# Altium PCB 3KW-139_V1.0_铝基板_IGBT.PcbDoc
Units mm, origin at the board's own origin, x right, y up, seen from the top; angles counter-clockwise.
Board outline 51.43 x 72.33 mm, 2 copper layers (Top Layer, Bottom Layer); 5 components, 26 nets, 4 pads, 0 vias.
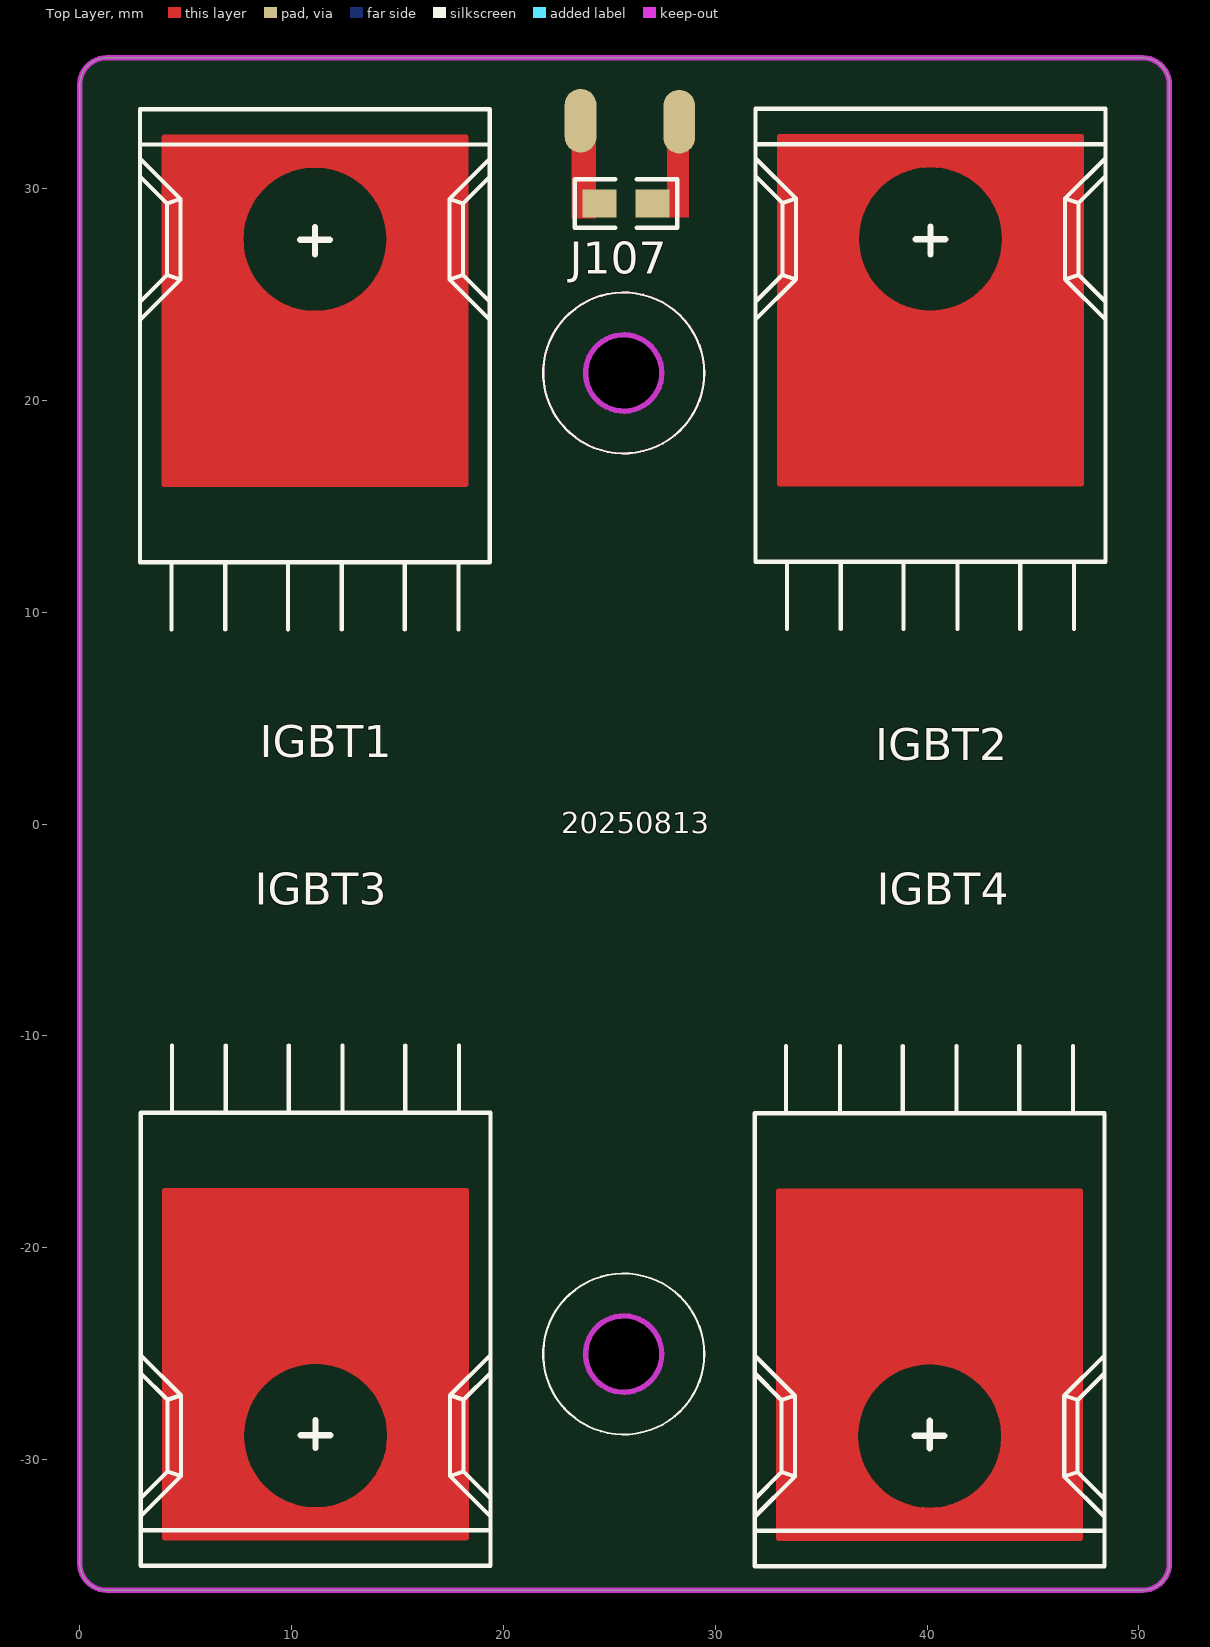
[diagram p0: Top Layer view]
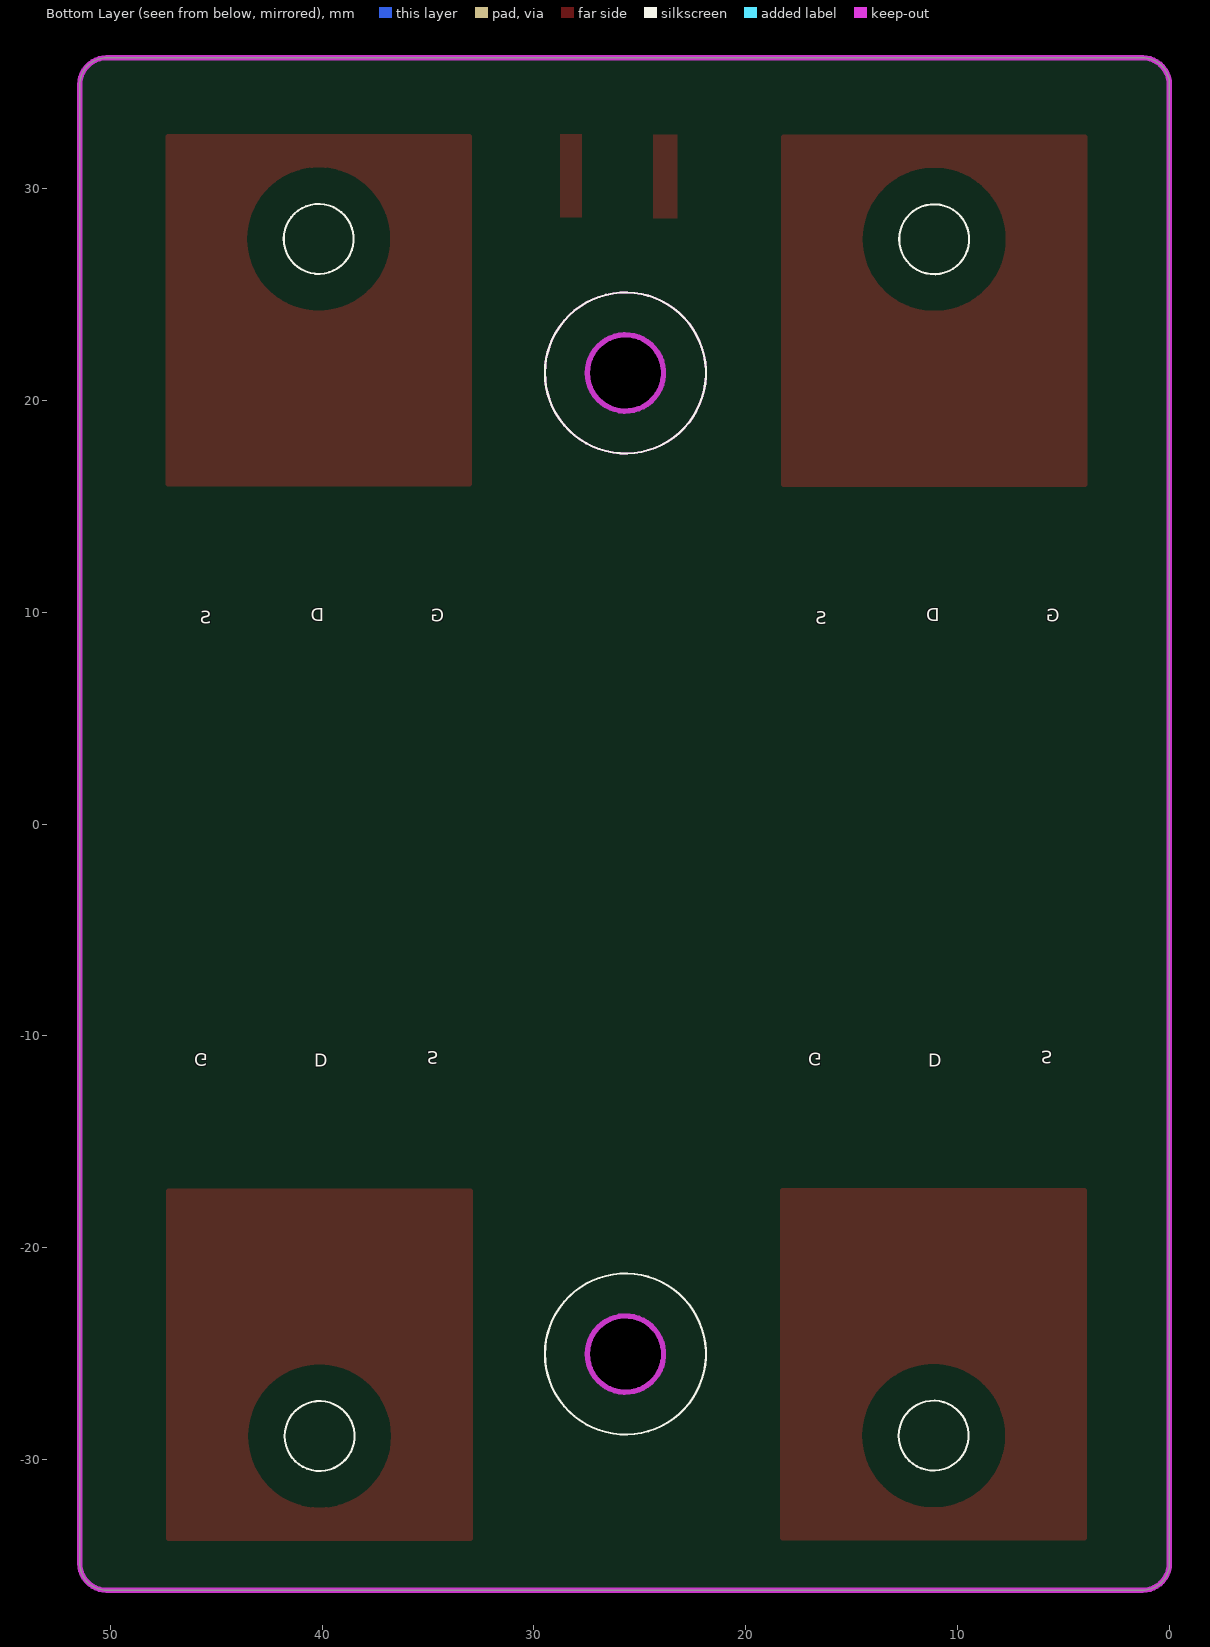
[diagram p1: Bottom Layer view, seen from below]

## Layer stack, top to bottom
Top Solder: solder mask 0.0102, Solder Resist, Dk 3.5
Top Layer: signal copper 0.0356
Dielectric 1: dielectric 0.32, FR-4, Dk 4.8
Bottom Layer: signal copper 0.0356
Bottom Solder: solder mask 0.0102, Solder Resist, Dk 3.5

## Board outline
0.01,-34.89 0.01,34.895 cw(c1.28,34.895) 1.28,36.165 50.165,36.165 cw(c50.165,34.895) 51.435,34.895 51.435,-34.89 cw(c50.165,-34.89) 50.165,-36.16 1.28,-36.16 cw(c1.28,-34.89)
cut-out: 23.882,21.29 ccw(c25.682,21.29) 25.682,19.49 ccw(c25.682,21.29) 27.482,21.29 ccw(c25.682,21.29) 25.682,23.09 ccw(c25.682,21.29)
cut-out: 23.879,-25.014 ccw(c25.679,-25.014) 25.679,-26.814 ccw(c25.679,-25.014) 27.479,-25.014 ccw(c25.679,-25.014) 25.679,-23.214 ccw(c25.679,-25.014)

## Design rules (kind name [scope] priority, off if disabled: settings)
Clearance [All] p1: gap=0.254 ignorepadtopadclearanceinfootprint=FALSE except(0: Arc-Hole Track-Hole SMDPad-Hole THPad-Hole Via-Hole Fill-Hole Poly-Hole Region-Hole Text-Hole)
PolygonConnect [All] p1: connectstyle=Relief reliefconductorwidth=0.254 reliefentries=4 polygonreliefangle="90 Angle" airgapwidth=0.254
RoutingVias [All] p1: holewidth=0.711 width=1.27 viastyle="Through Hole" minholewidth=0.711 minwidth=1.27 maxholewidth=0.711 maxwidth=1.27
SolderMaskExpansion [All] p1: expansion=0.102
Width [All] p1: maxlimit=0.254 minlimit=0.254 preferedwidth=0.254
30 further rules are at their usual default settings.

## Components (designator, comment, footprint, x,y, rotation, side; value= is the part's Value field where it differs from the comment)
IGBT1 "Comment" TO-247TP 11.11,27.599 r0 top locked
IGBT2 "Comment" TO-247TP 40.159,27.615 r0 top locked
IGBT3 "Comment" TO-247TP 11.138,-28.863 r180 top locked
IGBT4 "Comment" TO-247TP 40.117,-28.884 r180 top locked
J107 "Comment" 0805 25.789,29.287 r180 top

## Footprints (in the part's own frame and the unit in brackets; to place one, negate y for a bottom-side part, rotate by r counter-clockwise, add the part's x,y. Pads: shape width x height; smd on the part's side, far side on the other; paste and mask are expansions set on the pad)
0805 [mm]
  rect 1.6x1.3 smd: 1(-1.25,0) 2(1.25,0)
  silkscreen extent -2.41,-1.14 2.41,1.14, body extent -1.01,-0.62 0.99,0.58, height 0.5
TO-247TP [mm]
  Top Layer circle w0.254: c0,0 r3.5
  Top Layer region: 0.127,-3.556 -1.778,-3.429 -0.889,-11.557 0.635,-11.557 0.508,-3.429
  Top Layer region: -7.112,4.826 -7.112,-11.557 0.127,-11.557 0.127,-3.429 -0.889,-3.429 -2.032,-2.921 -3.175,-1.524 -3.429,-0.381 -3.429,0.635 -3.048,1.651 -2.159,2.794 -1.143,3.302 0.127,3.556 1.905,3.048 2.921,2.032 3.429,0.889 3.429,-0.508 3.048,-1.778 2.159,-2.794 1.016,-3.429 -0.762,-3.683 -0.635,-11.557 6.985,-11.557 6.985,4.826
  Top Layer lines w0.254: 4.318,-11.557 7.112,-11.557 7.112,-10.287 7.112,4.826 -7.112,4.826 ; -7.112,4.826 -7.112,3.302 -7.112,-11.557 -5.461,-11.557 6.985,-11.557 6.985,4.826 -7.112,4.826
  silkscreen extent -8.25,-18.41 8.26,6.14

## Free pads (board coordinates)
  oval 1.5x3 smd: 61(23.643,33.193) 61(28.3,33.15)

## Nets (pads, with @x,y where several pads share a name; then routed paths per layer and width w, separated by ;. In a path a pad name is that pad's centre, name@x,y a point inside that pad or via, vN(x,y) a via of type N, cw(c..) or ccw(c..) an arc to the next point about the centre after c; other vN are vias at no path point)
+15V-1: 
+15V-3: 
-9V-1: 
-9V-3: 
GND-1: 
LINE_L1: 
LINE_N: 
LINE_N1: 
NetC61_2: 
NetC65_2: 
NetC75_2: 
NetC76_1: 
NetD22_A: 
NetD23_A: 
NetD23_K: 
NetD24_A: 
NetD24_K: 
NetD25_A: 
NetD25_K: 
NetR75_2: 
NetR87_2: 
PWM2L: 
U_BUS: 
VO2: 
VO3: 
VO4: 
pads on no net: J107.1 J107.2

## Keep-outs
Keep-Out Layer:
  circle w0.254: c25.679,-25.014 r1.8
  circle w0.254: c25.682,21.29 r1.8
  circle w0.1: c25.682,21.29 r3.8
  lines w0.254: 1.27,36.165 50.165,36.165 cw(c50.165,34.895) 51.435,34.895 51.435,-34.89 cw(c50.165,-34.89) 50.165,-36.16 1.28,-36.16 cw(c1.28,-34.89) 0.01,-34.89 0.01,34.895 cw(c1.28,34.895) 1.28,36.165

## Other copper
Top Layer:
  region: 28.773,28.621 28.773,32.558 27.721,32.558 27.721,28.621
  region: 24.373,28.578 24.373,32.538 23.214,32.538 23.214,28.578

## Silkscreen, mask and mechanical layers (free items; w line width, h text height)
Top Overlay:
  circle w0.1: c25.682,21.29 r3.8
  circle w0.1: c25.682,-25.01 r3.8
  circle w0.1: c25.682,21.29 r3.8
  text "20250813" at 22.727,-0.437 h1
Bottom Overlay:
  circle w0.1: c25.682,21.29 r3.8
  circle w0.1: c25.682,-25.01 r3.8
  circle w0.1: c25.682,21.29 r3.8
Mechanical 1:
  circle w0.1: c25.682,-25.01 r3.8
  circle w0.1: c25.682,21.29 r3.8

## Text inside footprints (layer, text, board x,y; h text height)
IGBT1: Bottom Overlay "S" at 16.19,9.438 h0.6; Bottom Overlay "D" at 10.856,9.565 h0.6; Bottom Overlay "G" at 5.191,9.54 h0.6
IGBT2: Bottom Overlay "S" at 45.239,9.454 h0.6; Bottom Overlay "D" at 39.905,9.581 h0.6; Bottom Overlay "G" at 34.241,9.556 h0.6
IGBT3: Bottom Overlay "S" at 6.058,-10.702 h0.6 r180; Bottom Overlay "D" at 11.392,-10.829 h0.6 r180; Bottom Overlay "G" at 17.056,-10.804 h0.6 r180
IGBT4: Bottom Overlay "S" at 35.037,-10.723 h0.6 r180; Bottom Overlay "D" at 40.371,-10.85 h0.6 r180; Bottom Overlay "G" at 46.036,-10.825 h0.6 r180